# EAGLE board MxxxSMT8x11 (EAGLE 6.6.0), part 1 of 5
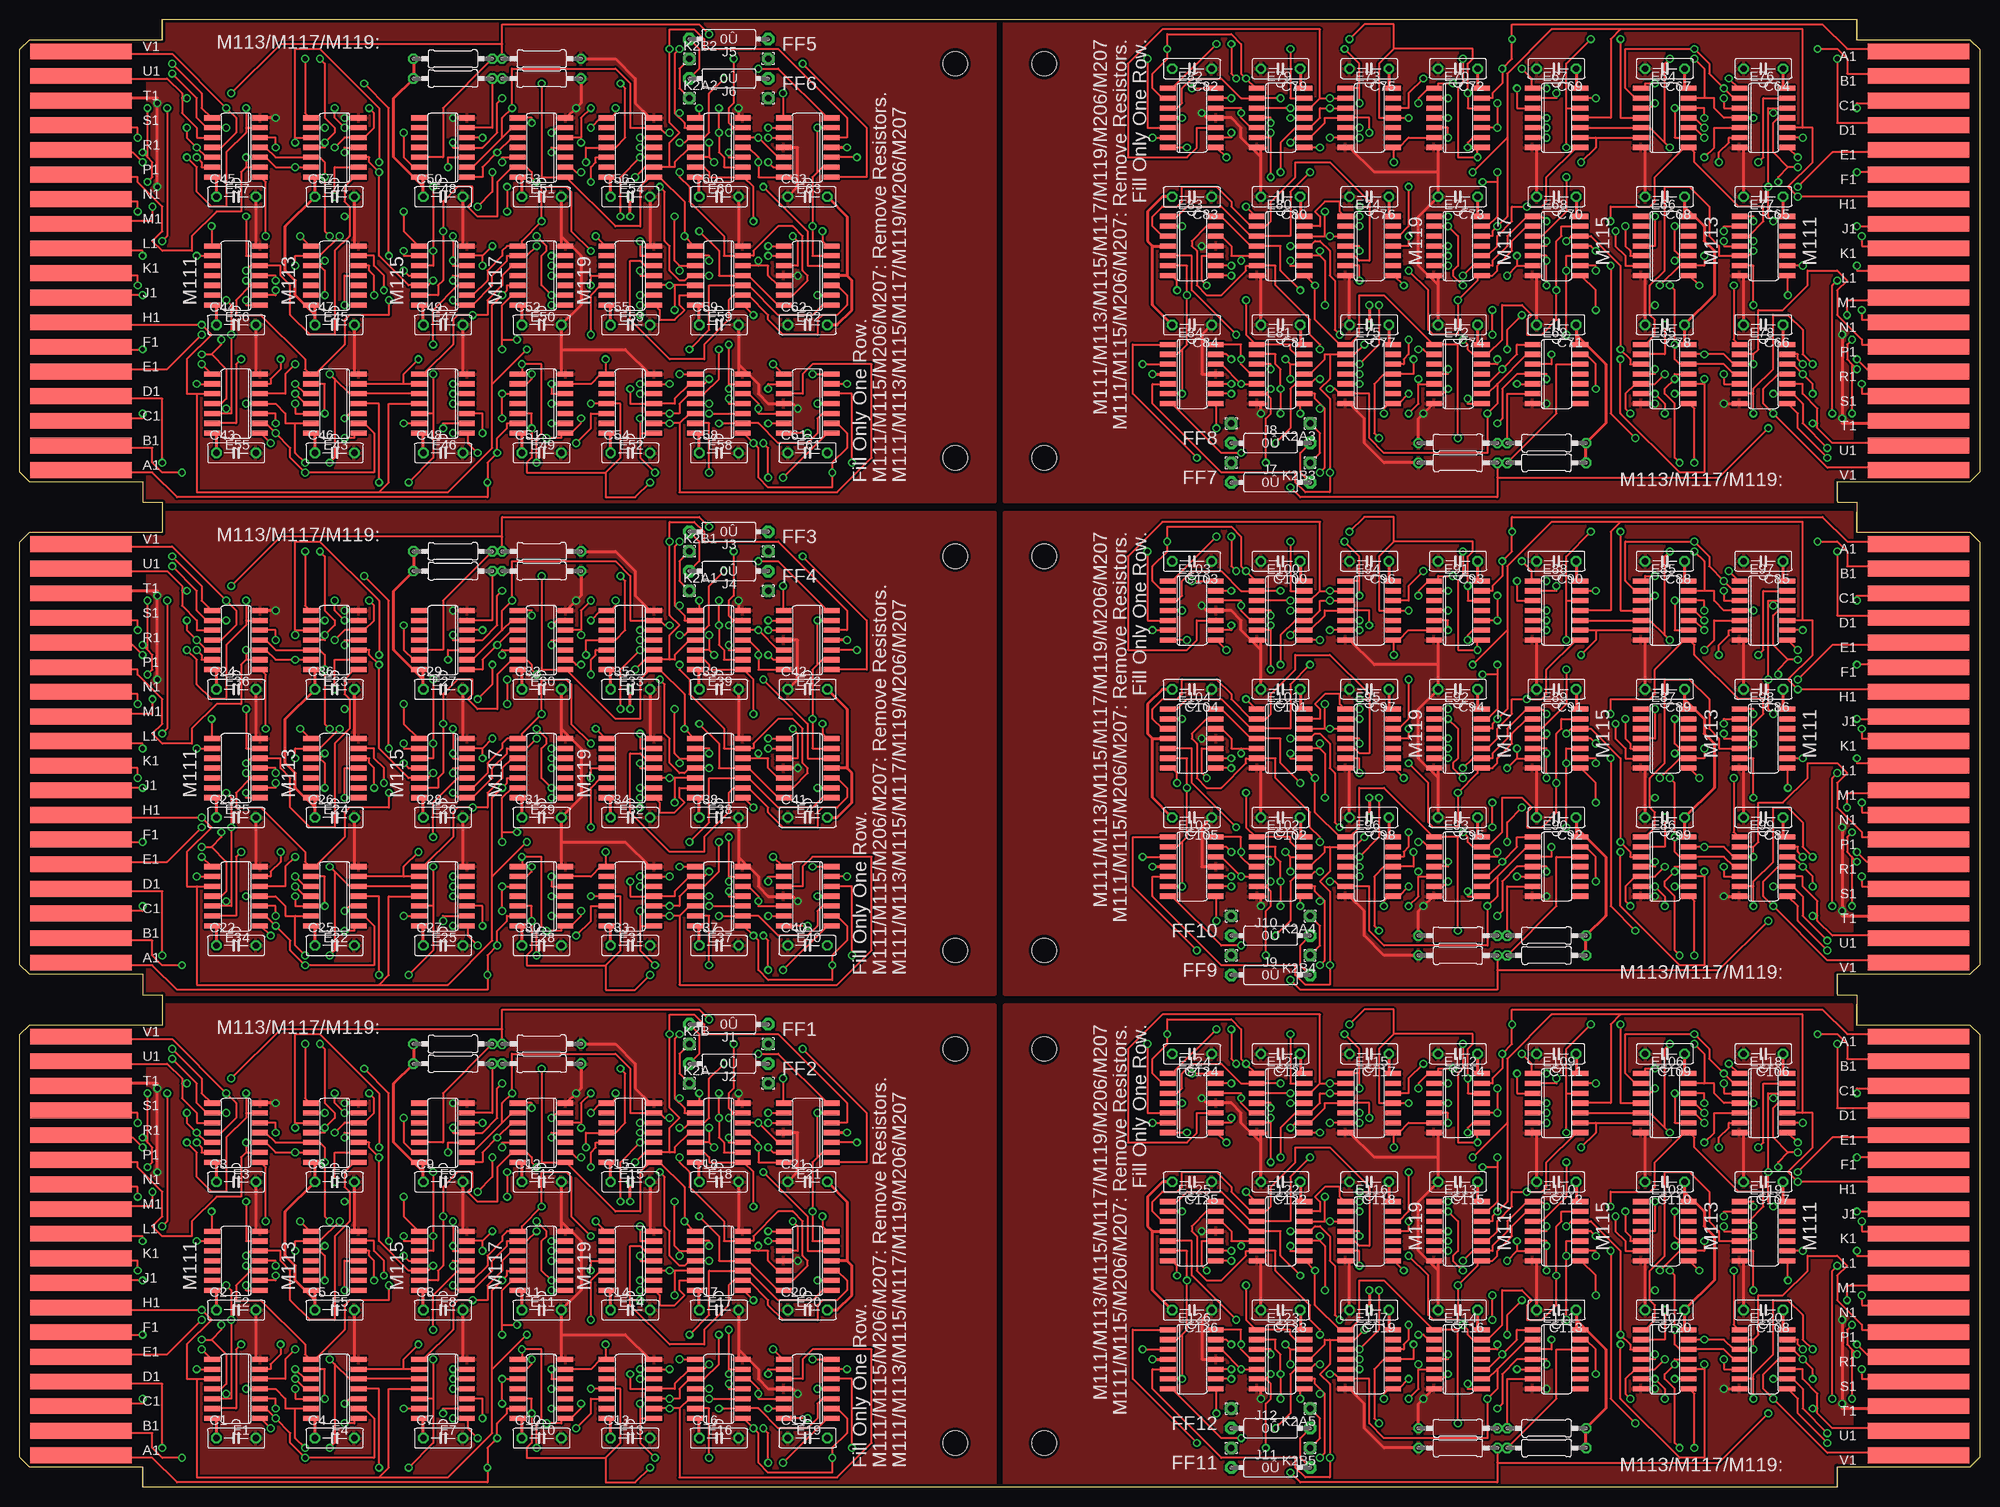
[diagram p0: board, top side]
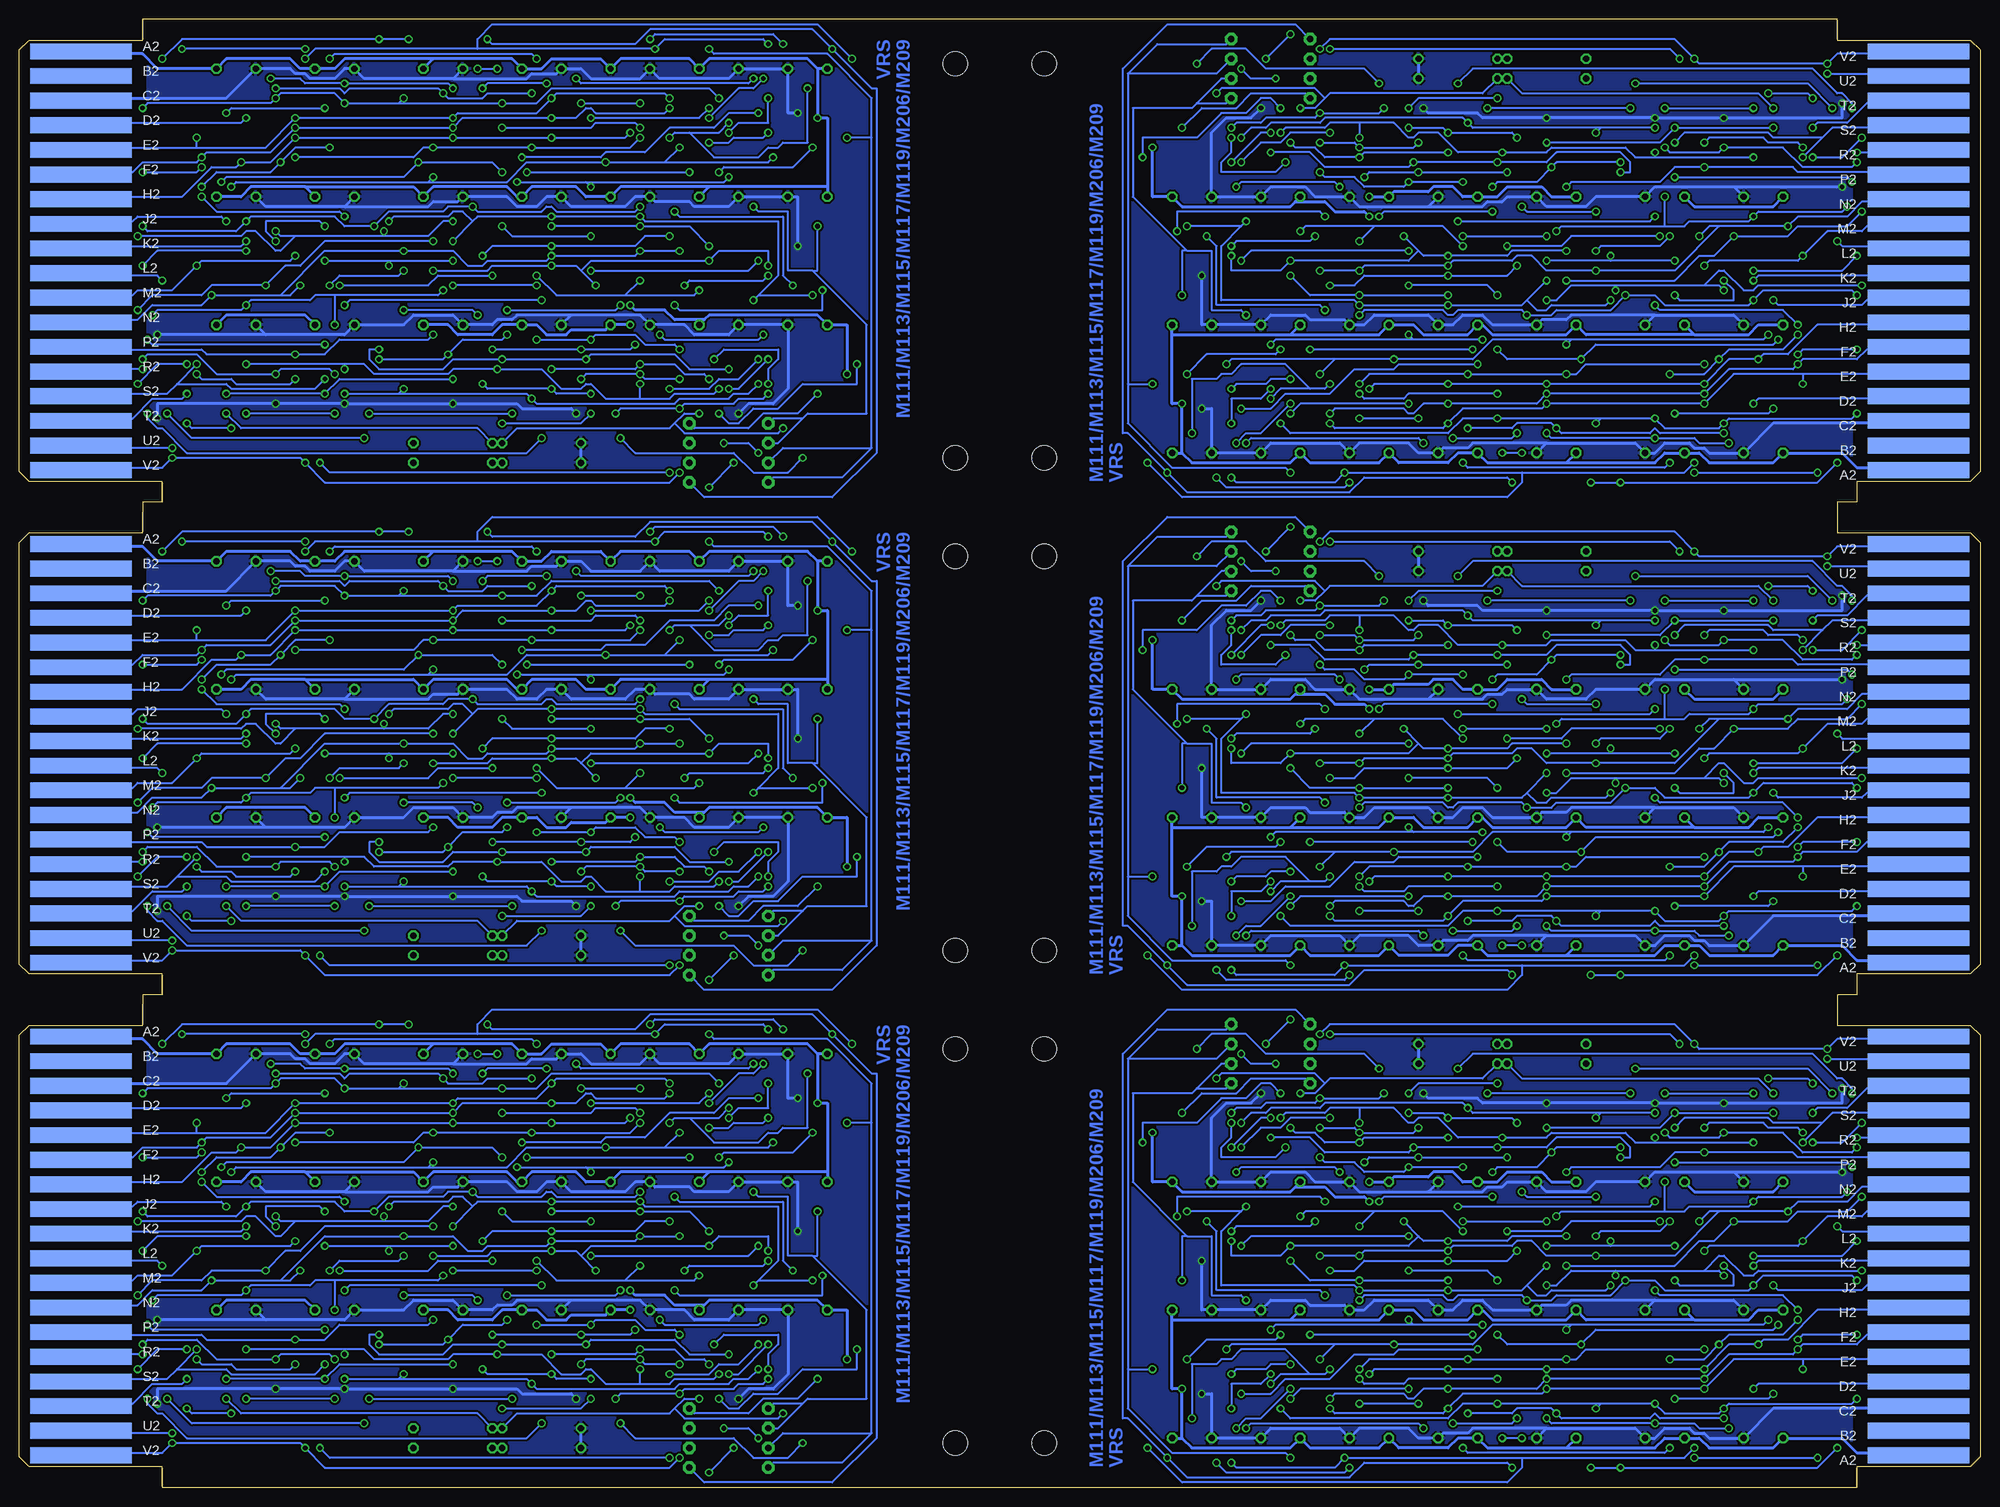
[diagram p1: board, bottom side, seen from below]

Size 252.73 x 189.23 mm. Coordinates in mm from the lower left corner, seen from the top.
Outline: 18.41,186.69 18.41,189.23 236.85,189.23 236.85,186.69
Outline: 234.31,129.54 234.31,127 236.85,127 236.85,123.19
Outline: 234.31,66.04 234.31,63.5 236.85,63.5 236.85,59.69
Outline: 234.31,2.54 234.31,0 15.88,0 15.88,2.54
Outline: 15.88,129.54 15.88,127 18.41,127 18.41,123.19
Outline: 15.88,66.04 15.88,63.5 18.41,63.5 18.41,59.69
Copper layers (1*16): Top 0.035mm / dielectric 1.5mm / Bottom 0.035mm
Design rules "10mils": minimum track width 10mil, minimum drill 24mil, track to track 10mil, track to pad 10mil, pad to pad 10mil, via to via 10mil, smd to smd 0mil, copper to edge 15mil, drill to drill 10mil, minimum pad ring 10mil, minimum via ring 8mil, stop-mask expansion 0mil, vias tented up to drill 0mil, thermal gap 10mil
Net classes: 1 Power: width 0.381 mm
Holes 3.17 mm at 120.65,183.51 132.08,183.51 120.65,132.72 132.08,132.72 132.08,120.02 120.65,120.02 120.65,69.22 120.65,56.52 132.08,56.52 132.08,69.22 120.65,5.71 132.08,5.71

## Footprints (pad centres in the part's own frame; a part is rotated, then mirrored left to right if it is on the bottom)
C050-025X075 = drill 0.813 octagon: 1 -2.54,0; 2 2.54,0
SO14 = smd 0.66 x 2.032: 1 -3.81,-3.073; 2 -2.54,-3.073; 3 -1.27,-3.073; 4 0,-3.073; 5 1.27,-3.073; 6 2.54,-3.073; 7 3.81,-3.073; 8 3.81,3.073; 9 2.54,3.073; 10 1.27,3.073; 11 0,3.073; 12 -1.27,3.073; 13 -2.54,3.073; 14 -3.81,3.073
1,6/0,8 = drill 0.813 pad 1.6 octagon: 1 0,0
0R/10 = drill 0.813 pad 1.6 octagon: 1 -5.08,0; 2 5.08,0
0207/10 = drill 0.813 octagon: 1 -5.08,0; 2 5.08,0
EDGE-CON2 = smd 13.106 x 2.032: A1 7.938,4.128; B1 7.938,7.303; C1 7.938,10.477; D1 7.938,13.652; E1 7.938,16.828; F1 7.938,20.003; H1 7.938,23.177; J1 7.938,26.352; K1 7.938,29.527; L1 7.938,32.703; M1 7.938,35.877; N1 7.938,39.053; P1 7.938,42.227; R1 7.938,45.403; S1 7.938,48.578; T1 7.938,51.752; U1 7.938,54.928; V1 7.938,58.102 | smd 13.106 x 2.032 bottom: A2 7.938,4.128; B2 7.938,7.303; C2 7.938,10.477; D2 7.938,13.652; E2 7.938,16.828; F2 7.938,20.003; H2 7.938,23.177; J2 7.938,26.352; K2 7.938,29.527; L2 7.938,32.703; M2 7.938,35.877; N2 7.938,39.053; P2 7.938,42.227; R2 7.938,45.403; S2 7.938,48.578; T2 7.938,51.752; U2 7.938,54.928; V2 7.938,58.102

## Placement (x,y rotation side)
C1  0.1uf  [C050-025X075]  27.94,6.35 0 top
C2  0.1uf  [C050-025X075]  27.94,22.86 0 top
C3  0.1uf  [C050-025X075]  27.94,39.37 0 top
C4  0.1uf  [C050-025X075]  40.64,6.35 0 top
C5  0.1uf  [C050-025X075]  40.64,22.86 0 top
C6  0.1uf  [C050-025X075]  40.64,39.37 0 top
C7  0.1uf  [C050-025X075]  54.61,6.35 0 top
C8  0.1uf  [C050-025X075]  54.61,22.86 0 top
C9  0.1uf  [C050-025X075]  54.61,39.37 0 top
C10  0.1uf  [C050-025X075]  67.31,6.35 0 top
C11  0.1uf  [C050-025X075]  67.31,22.86 0 top
C12  0.1uf  [C050-025X075]  67.31,39.37 0 top
C13  0.1uf  [C050-025X075]  78.74,6.35 0 top
C14  0.1uf  [C050-025X075]  78.74,22.86 0 top
C15  0.1uf  [C050-025X075]  78.74,39.37 0 top
C16  0.1uf  [C050-025X075]  90.17,6.35 0 top
C17  0.1uf  [C050-025X075]  90.17,22.86 0 top
C18  0.1uf  [C050-025X075]  90.17,39.37 0 top
C19  0.1uf  [C050-025X075]  101.6,6.35 180 top
C20  0.1uf  [C050-025X075]  101.6,22.86 180 top
C21  0.1uf  [C050-025X075]  101.6,39.37 180 top
C22  0.1uf  [C050-025X075]  27.94,69.85 0 top
C23  0.1uf  [C050-025X075]  27.94,86.36 0 top
C24  0.1uf  [C050-025X075]  27.94,102.87 0 top
C25  0.1uf  [C050-025X075]  40.64,69.85 0 top
C26  0.1uf  [C050-025X075]  40.64,86.36 0 top
C27  0.1uf  [C050-025X075]  54.61,69.85 0 top
C28  0.1uf  [C050-025X075]  54.61,86.36 0 top
C29  0.1uf  [C050-025X075]  54.61,102.87 0 top
C30  0.1uf  [C050-025X075]  67.31,69.85 0 top
C31  0.1uf  [C050-025X075]  67.31,86.36 0 top
C32  0.1uf  [C050-025X075]  67.31,102.87 0 top
C33  0.1uf  [C050-025X075]  78.74,69.85 0 top
C34  0.1uf  [C050-025X075]  78.74,86.36 0 top
C35  0.1uf  [C050-025X075]  78.74,102.87 0 top
C36  0.1uf  [C050-025X075]  40.64,102.87 0 top
C37  0.1uf  [C050-025X075]  90.17,69.85 0 top
C38  0.1uf  [C050-025X075]  90.17,86.36 0 top
C39  0.1uf  [C050-025X075]  90.17,102.87 0 top
C40  0.1uf  [C050-025X075]  101.6,69.85 180 top
C41  0.1uf  [C050-025X075]  101.6,86.36 180 top
C42  0.1uf  [C050-025X075]  101.6,102.87 180 top
C43  0.1uf  [C050-025X075]  27.94,133.35 0 top
C44  0.1uf  [C050-025X075]  27.94,149.86 0 top
C45  0.1uf  [C050-025X075]  27.94,166.37 0 top
C46  0.1uf  [C050-025X075]  40.64,133.35 0 top
C47  0.1uf  [C050-025X075]  40.64,149.86 0 top
C48  0.1uf  [C050-025X075]  54.61,133.35 0 top
C49  0.1uf  [C050-025X075]  54.61,149.86 0 top
C50  0.1uf  [C050-025X075]  54.61,166.37 0 top
C51  0.1uf  [C050-025X075]  67.31,133.35 0 top
C52  0.1uf  [C050-025X075]  67.31,149.86 0 top
C53  0.1uf  [C050-025X075]  67.31,166.37 0 top
C54  0.1uf  [C050-025X075]  78.74,133.35 0 top
C55  0.1uf  [C050-025X075]  78.74,149.86 0 top
C56  0.1uf  [C050-025X075]  78.74,166.37 0 top
C57  0.1uf  [C050-025X075]  40.64,166.37 0 top
C58  0.1uf  [C050-025X075]  90.17,133.35 0 top
C59  0.1uf  [C050-025X075]  90.17,149.86 0 top
C60  0.1uf  [C050-025X075]  90.17,166.37 0 top
C61  0.1uf  [C050-025X075]  101.6,133.35 180 top
C62  0.1uf  [C050-025X075]  101.6,149.86 180 top
C63  0.1uf  [C050-025X075]  101.6,166.37 180 top
C64  0.1uf  [C050-025X075]  224.79,182.88 180 top
C65  0.1uf  [C050-025X075]  224.79,166.37 180 top
C66  0.1uf  [C050-025X075]  224.79,149.86 180 top
C67  0.1uf  [C050-025X075]  212.09,182.88 180 top
C68  0.1uf  [C050-025X075]  212.09,166.37 180 top
C69  0.1uf  [C050-025X075]  198.12,182.88 180 top
C70  0.1uf  [C050-025X075]  198.12,166.37 180 top
C71  0.1uf  [C050-025X075]  198.12,149.86 180 top
C72  0.1uf  [C050-025X075]  185.42,182.88 180 top
C73  0.1uf  [C050-025X075]  185.42,166.37 180 top
C74  0.1uf  [C050-025X075]  185.42,149.86 180 top
C75  0.1uf  [C050-025X075]  173.99,182.88 180 top
C76  0.1uf  [C050-025X075]  173.99,166.37 180 top
C77  0.1uf  [C050-025X075]  173.99,149.86 180 top
C78  0.1uf  [C050-025X075]  212.09,149.86 180 top
C79  0.1uf  [C050-025X075]  162.56,182.88 180 top
C80  0.1uf  [C050-025X075]  162.56,166.37 180 top
C81  0.1uf  [C050-025X075]  162.56,149.86 180 top
C82  0.1uf  [C050-025X075]  151.13,182.88 0 top
C83  0.1uf  [C050-025X075]  151.13,166.37 0 top
C84  0.1uf  [C050-025X075]  151.13,149.86 0 top
C85  0.1uf  [C050-025X075]  224.79,119.38 180 top
C86  0.1uf  [C050-025X075]  224.79,102.87 180 top
C87  0.1uf  [C050-025X075]  224.79,86.36 180 top
C88  0.1uf  [C050-025X075]  212.09,119.38 180 top
C89  0.1uf  [C050-025X075]  212.09,102.87 180 top
C90  0.1uf  [C050-025X075]  198.12,119.38 180 top
C91  0.1uf  [C050-025X075]  198.12,102.87 180 top
C92  0.1uf  [C050-025X075]  198.12,86.36 180 top
C93  0.1uf  [C050-025X075]  185.42,119.38 180 top
C94  0.1uf  [C050-025X075]  185.42,102.87 180 top
C95  0.1uf  [C050-025X075]  185.42,86.36 180 top
C96  0.1uf  [C050-025X075]  173.99,119.38 180 top
C97  0.1uf  [C050-025X075]  173.99,102.87 180 top
C98  0.1uf  [C050-025X075]  173.99,86.36 180 top
C99  0.1uf  [C050-025X075]  212.09,86.36 180 top
C100  0.1uf  [C050-025X075]  162.56,119.38 180 top
C101  0.1uf  [C050-025X075]  162.56,102.87 180 top
C102  0.1uf  [C050-025X075]  162.56,86.36 180 top
C103  0.1uf  [C050-025X075]  151.13,119.38 0 top
C104  0.1uf  [C050-025X075]  151.13,102.87 0 top
C105  0.1uf  [C050-025X075]  151.13,86.36 0 top
C106  0.1uf  [C050-025X075]  224.79,55.88 180 top
C107  0.1uf  [C050-025X075]  224.79,39.37 180 top
C108  0.1uf  [C050-025X075]  224.79,22.86 180 top
C109  0.1uf  [C050-025X075]  212.09,55.88 180 top
C110  0.1uf  [C050-025X075]  212.09,39.37 180 top
C111  0.1uf  [C050-025X075]  198.12,55.88 180 top
C112  0.1uf  [C050-025X075]  198.12,39.37 180 top
C113  0.1uf  [C050-025X075]  198.12,22.86 180 top
C114  0.1uf  [C050-025X075]  185.42,55.88 180 top
C115  0.1uf  [C050-025X075]  185.42,39.37 180 top
C116  0.1uf  [C050-025X075]  185.42,22.86 180 top
C117  0.1uf  [C050-025X075]  173.99,55.88 180 top
C118  0.1uf  [C050-025X075]  173.99,39.37 180 top
C119  0.1uf  [C050-025X075]  173.99,22.86 180 top
C120  0.1uf  [C050-025X075]  212.09,22.86 180 top
C121  0.1uf  [C050-025X075]  162.56,55.88 180 top
C122  0.1uf  [C050-025X075]  162.56,39.37 180 top
C123  0.1uf  [C050-025X075]  162.56,22.86 180 top
C124  0.1uf  [C050-025X075]  151.13,55.88 0 top
C125  0.1uf  [C050-025X075]  151.13,39.37 0 top
C126  0.1uf  [C050-025X075]  151.13,22.86 0 top
E1  7404D  [SO14]  27.94,12.7 90 top
E2  7404D  [SO14]  27.94,29.21 90 top
E3  7404D  [SO14]  27.94,45.72 90 top
E4  7400D  [SO14]  40.64,12.7 90 top
E5  7400D  [SO14]  40.64,29.21 90 top
E6  7400D  [SO14]  40.64,45.72 90 top
E7  7410D  [SO14]  54.61,12.7 90 top
E8  7410D  [SO14]  54.61,29.21 90 top
E9  7410D  [SO14]  54.61,45.72 90 top
E10  7420D  [SO14]  67.31,12.7 90 top
E11  7420D  [SO14]  67.31,29.21 90 top
E12  7420D  [SO14]  67.31,45.72 90 top
E13  7430D  [SO14]  78.74,12.7 90 top
E14  7430D  [SO14]  78.74,29.21 90 top
E15  7430D  [SO14]  78.74,45.72 90 top
E16  7474D  [SO14]  90.17,12.7 90 top
E17  7474D  [SO14]  90.17,29.21 90 top
E18  7474D  [SO14]  90.17,45.72 90 top
E19  7473D  [SO14]  101.6,12.7 90 top
E20  7473D  [SO14]  101.6,29.21 90 top
E21  7473D  [SO14]  101.6,45.72 90 top
E22  7400D  [SO14]  40.64,76.2 90 top
E23  7400D  [SO14]  40.64,109.22 90 top
E24  7400D  [SO14]  40.64,92.71 90 top
E25  7410D  [SO14]  54.61,76.2 90 top
E26  7410D  [SO14]  54.61,92.71 90 top
E27  7410D  [SO14]  54.61,109.22 90 top
E28  7420D  [SO14]  67.31,76.2 90 top
E29  7420D  [SO14]  67.31,92.71 90 top
E30  7420D  [SO14]  67.31,109.22 90 top
E31  7430D  [SO14]  78.74,76.2 90 top
E32  7430D  [SO14]  78.74,92.71 90 top
E33  7430D  [SO14]  78.74,109.22 90 top
E34  7404D  [SO14]  27.94,76.2 90 top
E35  7404D  [SO14]  27.94,92.71 90 top
E36  7404D  [SO14]  27.94,109.22 90 top
E37  7474D  [SO14]  90.17,76.2 90 top
E38  7474D  [SO14]  90.17,92.71 90 top
E39  7474D  [SO14]  90.17,109.22 90 top
E40  7473D  [SO14]  101.6,76.2 90 top
E41  7473D  [SO14]  101.6,92.71 90 top
E42  7473D  [SO14]  101.6,109.22 90 top
E43  7400D  [SO14]  40.64,139.7 90 top
E44  7400D  [SO14]  40.64,172.72 90 top
E45  7400D  [SO14]  40.64,156.21 90 top
E46  7410D  [SO14]  54.61,139.7 90 top
E47  7410D  [SO14]  54.61,156.21 90 top
E48  7410D  [SO14]  54.61,172.72 90 top
E49  7420D  [SO14]  67.31,139.7 90 top
E50  7420D  [SO14]  67.31,156.21 90 top
E51  7420D  [SO14]  67.31,172.72 90 top
E52  7430D  [SO14]  78.74,139.7 90 top
E53  7430D  [SO14]  78.74,156.21 90 top
E54  7430D  [SO14]  78.74,172.72 90 top
E55  7404D  [SO14]  27.94,139.7 90 top
E56  7404D  [SO14]  27.94,156.21 90 top
E57  7404D  [SO14]  27.94,172.72 90 top
E58  7474D  [SO14]  90.17,139.7 90 top
E59  7474D  [SO14]  90.17,156.21 90 top
E60  7474D  [SO14]  90.17,172.72 90 top
E61  7473D  [SO14]  101.6,139.7 90 top
E62  7473D  [SO14]  101.6,156.21 90 top
E63  7473D  [SO14]  101.6,172.72 90 top
E64  7400D  [SO14]  212.09,176.53 270 top
E65  7400D  [SO14]  212.09,143.51 270 top
E66  7400D  [SO14]  212.09,160.02 270 top
E67  7410D  [SO14]  198.12,176.53 270 top
E68  7410D  [SO14]  198.12,160.02 270 top
E69  7410D  [SO14]  198.12,143.51 270 top
E70  7420D  [SO14]  185.42,176.53 270 top
E71  7420D  [SO14]  185.42,160.02 270 top
E72  7420D  [SO14]  185.42,143.51 270 top
E73  7430D  [SO14]  173.99,176.53 270 top
E74  7430D  [SO14]  173.99,160.02 270 top
E75  7430D  [SO14]  173.99,143.51 270 top
E76  7404D  [SO14]  224.79,176.53 270 top
E77  7404D  [SO14]  224.79,160.02 270 top
E78  7404D  [SO14]  224.79,143.51 270 top
E79  7474D  [SO14]  162.56,176.53 270 top
E80  7474D  [SO14]  162.56,160.02 270 top
E81  7474D  [SO14]  162.56,143.51 270 top
E82  7473D  [SO14]  151.13,176.53 270 top
E83  7473D  [SO14]  151.13,160.02 270 top
E84  7473D  [SO14]  151.13,143.51 270 top
E85  7400D  [SO14]  212.09,113.03 270 top
E86  7400D  [SO14]  212.09,80.01 270 top
E87  7400D  [SO14]  212.09,96.52 270 top
E88  7410D  [SO14]  198.12,113.03 270 top
E89  7410D  [SO14]  198.12,96.52 270 top
E90  7410D  [SO14]  198.12,80.01 270 top
E91  7420D  [SO14]  185.42,113.03 270 top
E92  7420D  [SO14]  185.42,96.52 270 top
E93  7420D  [SO14]  185.42,80.01 270 top
E94  7430D  [SO14]  173.99,113.03 270 top
E95  7430D  [SO14]  173.99,96.52 270 top
E96  7430D  [SO14]  173.99,80.01 270 top
E97  7404D  [SO14]  224.79,113.03 270 top
E98  7404D  [SO14]  224.79,96.52 270 top
E99  7404D  [SO14]  224.79,80.01 270 top
E100  7474D  [SO14]  162.56,113.03 270 top
E101  7474D  [SO14]  162.56,96.52 270 top
E102  7474D  [SO14]  162.56,80.01 270 top
E103  7473D  [SO14]  151.13,113.03 270 top
E104  7473D  [SO14]  151.13,96.52 270 top
E105  7473D  [SO14]  151.13,80.01 270 top
E106  7400D  [SO14]  212.09,49.53 270 top
E107  7400D  [SO14]  212.09,16.51 270 top
E108  7400D  [SO14]  212.09,33.02 270 top
E109  7410D  [SO14]  198.12,49.53 270 top
E110  7410D  [SO14]  198.12,33.02 270 top
E111  7410D  [SO14]  198.12,16.51 270 top
E112  7420D  [SO14]  185.42,49.53 270 top
E113  7420D  [SO14]  185.42,33.02 270 top
E114  7420D  [SO14]  185.42,16.51 270 top
E115  7430D  [SO14]  173.99,49.53 270 top
E116  7430D  [SO14]  173.99,33.02 270 top
E117  7430D  [SO14]  173.99,16.51 270 top
E118  7404D  [SO14]  224.79,49.53 270 top
E119  7404D  [SO14]  224.79,33.02 270 top
E120  7404D  [SO14]  224.79,16.51 270 top
E121  7474D  [SO14]  162.56,49.53 270 top
E122  7474D  [SO14]  162.56,33.02 270 top
E123  7474D  [SO14]  162.56,16.51 270 top
E124  7473D  [SO14]  151.13,49.53 270 top
E125  7473D  [SO14]  151.13,33.02 270 top
E126  7473D  [SO14]  151.13,16.51 270 top
FF1  [1,6/0,8]  96.52,57.15 0 top
FF2  [1,6/0,8]  96.52,52.07 0 top
FF3  [1,6/0,8]  96.52,120.65 0 top
FF4  [1,6/0,8]  96.52,115.57 0 top
FF5  [1,6/0,8]  96.52,184.15 0 top
FF6  [1,6/0,8]  96.52,179.07 0 top
FF7  [1,6/0,8]  156.21,132.08 180 top
FF8  [1,6/0,8]  156.21,137.16 180 top
FF9  [1,6/0,8]  156.21,68.58 180 top
FF10  [1,6/0,8]  156.21,73.66 180 top
FF11  [1,6/0,8]  156.21,5.08 180 top
FF12  [1,6/0,8]  156.21,10.16 180 top
J1  [0R/10]  91.44,59.69 0 top
J2  [0R/10]  91.44,54.61 0 top
J3  [0R/10]  91.44,123.19 0 top
J4  [0R/10]  91.44,118.11 0 top
J5  [0R/10]  91.44,186.69 0 top
J6  [0R/10]  91.44,181.61 0 top
J7  [0R/10]  161.29,129.54 180 top
J8  [0R/10]  161.29,134.62 180 top
J9  [0R/10]  161.29,66.04 180 top
J10  [0R/10]  161.29,71.12 180 top
J11  [0R/10]  161.29,2.54 180 top
J12  [0R/10]  161.29,7.62 180 top
K2A  [1,6/0,8]  86.36,52.07 0 top
K2A1  [1,6/0,8]  86.36,115.57 0 top
K2A2  [1,6/0,8]  86.36,179.07 0 top
K2A3  [1,6/0,8]  166.37,137.16 180 top
K2A4  [1,6/0,8]  166.37,73.66 180 top
K2A5  [1,6/0,8]  166.37,10.16 180 top
K2B  [1,6/0,8]  86.36,57.15 0 top
K2B1  [1,6/0,8]  86.36,120.65 0 top
K2B2  [1,6/0,8]  86.36,184.15 0 top
K2B3  [1,6/0,8]  166.37,132.08 180 top
K2B4  [1,6/0,8]  166.37,68.58 180 top
K2B5  [1,6/0,8]  166.37,5.08 180 top
R1  750  [0207/10]  67.31,57.15 180 top
R2  330  [0207/10]  55.88,57.15 180 top
R3  750  [0207/10]  67.31,54.61 180 top
R4  330  [0207/10]  55.88,54.61 180 top
R5  750  [0207/10]  67.31,120.65 180 top
R6  330  [0207/10]  55.88,120.65 180 top
R7  330  [0207/10]  55.88,118.11 180 top
R8  750  [0207/10]  67.31,118.11 180 top
R9  750  [0207/10]  67.31,184.15 180 top
R10  330  [0207/10]  55.88,184.15 180 top
R11  330  [0207/10]  55.88,181.61 180 top
R12  750  [0207/10]  67.31,181.61 180 top
R13  750  [0207/10]  185.42,132.08 0 top
R14  330  [0207/10]  196.85,132.08 0 top
R15  330  [0207/10]  196.85,134.62 0 top
R16  750  [0207/10]  185.42,134.62 0 top
R17  750  [0207/10]  185.42,68.58 0 top
R18  330  [0207/10]  196.85,68.58 0 top
R19  330  [0207/10]  196.85,71.12 0 top
R20  750  [0207/10]  185.42,71.12 0 top
R21  750  [0207/10]  185.42,5.08 0 top
R22  330  [0207/10]  196.85,5.08 0 top
R23  330  [0207/10]  196.85,7.62 0 top
R24  750  [0207/10]  185.42,7.62 0 top
U$1  [EDGE-CON2]  0,0 0 top
U$2  [EDGE-CON2]  0,63.5 0 top
U$5  [EDGE-CON2]  0,127 0 top
U$7  [EDGE-CON2]  252.73,189.23 180 top
U$9  [EDGE-CON2]  252.73,125.73 180 top
U$11  [EDGE-CON2]  252.73,62.23 180 top

## Library data of the parts
C1-C126 R1-R24 = rcl
E1-E126 = 74xx-us
FF1-FF12 K2A K2A1-K2A5 K2B K2B1-K2B5 = wirepad
J1-J12 = jumper
U$1 U$2 U$5 U$7 U$9 U$11 = dec-con

## Nets
A1: E1.1 E4.1 E7.1 E10.13 E13.12 E16.1 E19.2 J1.1 J2.1 U$1.A1
A2: E22.1 E25.1 E28.13 E31.12 E34.1 E37.1 E40.2 J3.1 J4.1 U$2.A1
A3: E43.1 E46.1 E49.13 E52.12 E55.1 E58.1 E61.2 J5.1 J6.1 U$5.A1
A4: E64.1 E67.1 E70.13 E73.12 E76.1 E79.1 E82.2 J7.1 J8.1 U$7.A1
A5: E85.1 E88.1 E91.13 E94.12 E97.1 E100.1 E103.2 J9.1 J10.1 U$9.A1
A6: E106.1 E109.1 E112.13 E115.12 E118.1 E121.1 E124.2 J11.1 J12.1 U$11.A1
B1: E1.2 E4.2 E7.2 E10.12 E13.11 E16.3 E19.1 U$1.B1
B2: U$1.B2
B3: U$2.B2
B4: E22.2 E25.2 E28.12 E31.11 E34.2 E37.3 E40.1 U$2.B1
B5: U$5.B2
B6: E43.2 E46.2 E49.12 E52.11 E55.2 E58.3 E61.1 U$5.B1
B7: U$7.B2
B8: E64.2 E67.2 E70.12 E73.11 E76.2 E79.3 E82.1 U$7.B1
B9: U$9.B2
B10: E85.2 E88.2 E91.12 E94.11 E97.2 E100.3 E103.1 U$9.B1
B11: U$11.B2
B12: E106.2 E109.2 E112.12 E115.11 E118.2 E121.3 E124.1 U$11.B1
C1: E1.3 E4.3 E7.13 E10.10 E13.5 E16.2 E19.3 U$1.C1
C2: E22.3 E25.13 E28.10 E31.5 E34.3 E37.2 E40.3 U$2.C1
C3: E43.3 E46.13 E49.10 E52.5 E55.3 E58.2 E61.3 U$5.C1
C4: E64.3 E67.13 E70.10 E73.5 E76.3 E79.2 E82.3 U$7.C1
C5: E85.3 E88.13 E91.10 E94.5 E97.3 E100.2 E103.3 U$9.C1
C6: E106.3 E109.13 E112.10 E115.5 E118.3 E121.2 E124.3 U$11.C1
D1: E1.5 E4.4 E7.12 E10.9 E13.6 E16.4 E19.14 U$1.D1
D2: E1.4 E4.13 E7.3 E10.1 E13.1 E16.11 E19.5 U$1.D2
D3: E22.13 E25.3 E28.1 E31.1 E34.4 E37.11 E40.5 U$2.D2
D4: E22.4 E25.12 E28.9 E31.6 E34.5 E37.4 E40.14 U$2.D1
D5: E43.13 E46.3 E49.1 E52.1 E55.4 E58.11 E61.5 U$5.D2
D6: E43.4 E46.12 E49.9 E52.6 E55.5 E58.4 E61.14 U$5.D1
D7: E64.13 E67.3 E70.1 E73.1 E76.4 E79.11 E82.5 U$7.D2
D8: E64.4 E67.12 E70.9 E73.6 E76.5 E79.4 E82.14 U$7.D1
D9: E85.13 E88.3 E91.1 E94.1 E97.4 E100.11 E103.5 U$9.D2
D10: E85.4 E88.12 E91.9 E94.6 E97.5 E100.4 E103.14 U$9.D1
D11: E106.13 E109.3 E112.1 E115.1 E118.4 E121.11 E124.5 U$11.D2
D12: E106.4 E109.12 E112.9 E115.6 E118.5 E121.4 E124.14 U$11.D1
E1: E1.6 E4.5 E7.10 E10.8 E16.5 E19.12 U$1.E1
E2: E1.9 E4.12 E7.4 E10.2 E13.2 E16.12 E19.10 U$1.E2
E3: E22.12 E25.4 E28.2 E31.2 E34.9 E37.12 E40.10 U$2.E2
E4: E22.5 E25.10 E28.8 E34.6 E37.5 E40.12 U$2.E1
E5: E43.12 E46.4 E49.2 E52.2 E55.9 E58.12 E61.10 U$5.E2
E6: E43.5 E46.10 E49.8 E55.6 E58.5 E61.12 U$5.E1
E7: E64.12 E67.4 E70.2 E73.2 E76.9 E79.12 E82.10 U$7.E2
E8: E64.5 E67.10 E70.8 E76.6 E79.5 E82.12 U$7.E1
E9: E85.12 E88.4 E91.2 E94.2 E97.9 E100.12 E103.10 U$9.E2
E10: E85.5 E88.10 E91.8 E97.6 E100.5 E103.12 U$9.E1
E11: E106.12 E109.4 E112.2 E115.2 E118.9 E121.12 E124.10 U$11.E2
E12: E106.5 E109.10 E112.8 E118.6 E121.5 E124.12 U$11.E1
F1: E1.11 E4.6 E7.9 E11.13 E14.12 E16.6 E19.13 U$1.F1
F2: E1.8 E4.11 E7.5 E10.4 E13.3 E16.10 E19.7 U$1.F2
F3: E22.11 E25.5 E28.4 E31.3 E34.8 E37.10 E40.7 U$2.F2
F4: E22.6 E25.9 E29.13 E32.12 E34.11 E37.6 E40.13 U$2.F1
F5: E43.11 E46.5 E49.4 E52.3 E55.8 E58.10 E61.7 U$5.F2
F6: E43.6 E46.9 E50.13 E53.12 E55.11 E58.6 E61.13 U$5.F1
F7: E64.11 E67.5 E70.4 E73.3 E76.8 E79.10 E82.7 U$7.F2
F8: E64.6 E67.9 E71.13 E74.12 E76.11 E79.6 E82.13 U$7.F1
F9: E85.11 E88.5 E91.4 E94.3 E97.8 E100.10 E103.7 U$9.F2
F10: E85.6 E88.9 E92.13 E95.12 E97.11 E100.6 E103.13 U$9.F1
F11: E106.11 E109.5 E112.4 E115.3 E118.8 E121.10 E124.7 U$11.F2
F12: E106.6 E109.9 E113.13 E116.12 E118.11 E121.6 E124.13 U$11.F1
FF1: E16.13 E19.6 FF1.1 J1.2
FF2: E17.1 E20.2 FF2.1 J2.2
FF3: E37.13 E40.6 FF3.1 J3.2
FF4: E38.1 E41.2 FF4.1 J4.2
FF5: E58.13 E61.6 FF5.1 J5.2
FF6: E59.1 E62.2 FF6.1 J6.2
FF7: E79.13 E82.6 FF7.1 J7.2
FF8: E80.1 E83.2 FF8.1 J8.2
FF9: E100.13 E103.6 FF9.1 J9.2
FF10: E101.1 E104.2 FF10.1 J10.2
FF11: E121.13 E124.6 FF11.1 J11.2
FF12: E122.1 E125.2 FF12.1 J12.2
GND [Power]: C1.2 C2.2 C3.2 C4.2 C5.2 C6.2 C7.2 C8.2 C9.2 C10.2 C11.2 C12.2 C13.2 C14.2 C15.2 C16.2 C17.2 C18.2 C19.2 C20.2 C21.2 E1.7 E2.7 E3.7 E4.7 E5.7 E6.7 E7.7 E8.7 E9.7 E10.7 E11.7 E12.7 E13.7 E14.7 E15.7 E16.7 E17.7 E18.7 E19.11 E20.11 E21.11 R1.1 R3.1 U$1.C2 U$1.T1
GND1 [Power]: C22.2 C23.2 C24.2 C25.2 C26.2 C27.2 C28.2 C29.2 C30.2 C31.2 C32.2 C33.2 C34.2 C35.2 C36.2 C37.2 C38.2 C39.2 C40.2 C41.2 C42.2 E22.7 E23.7 E24.7 E25.7 E26.7 E27.7 E28.7 E29.7 E30.7 E31.7 E32.7 E33.7 E34.7 E35.7 E36.7 E37.7 E38.7 E39.7 E40.11 E41.11 E42.11 R5.1 R8.1 U$2.C2 U$2.T1
GND2 [Power]: C43.2 C44.2 C45.2 C46.2 C47.2 C48.2 C49.2 C50.2 C51.2 C52.2 C53.2 C54.2 C55.2 C56.2 C57.2 C58.2 C59.2 C60.2 C61.2 C62.2 C63.2 E43.7 E44.7 E45.7 E46.7 E47.7 E48.7 E49.7 E50.7 E51.7 E52.7 E53.7 E54.7 E55.7 E56.7 E57.7 E58.7 E59.7 E60.7 E61.11 E62.11 E63.11 R9.1 R12.1 U$5.C2 U$5.T1
GND3 [Power]: C64.2 C65.2 C66.2 C67.2 C68.2 C69.2 C70.2 C71.2 C72.2 C73.2 C74.2 C75.2 C76.2 C77.2 C78.2 C79.2 C80.2 C81.2 C82.2 C83.2 C84.2 E64.7 E65.7 E66.7 E67.7 E68.7 E69.7 E70.7 E71.7 E72.7 E73.7 E74.7 E75.7 E76.7 E77.7 E78.7 E79.7 E80.7 E81.7 E82.11 E83.11 E84.11 R13.1 R16.1 U$7.C2 U$7.T1
GND4 [Power]: C85.2 C86.2 C87.2 C88.2 C89.2 C90.2 C91.2 C92.2 C93.2 C94.2 C95.2 C96.2 C97.2 C98.2 C99.2 C100.2 C101.2 C102.2 C103.2 C104.2 C105.2 E85.7 E86.7 E87.7 E88.7 E89.7 E90.7 E91.7 E92.7 E93.7 E94.7 E95.7 E96.7 E97.7 E98.7 E99.7 E100.7 E101.7 E102.7 E103.11 E104.11 E105.11 R17.1 R20.1 U$9.C2 U$9.T1
GND5 [Power]: C106.2 C107.2 C108.2 C109.2 C110.2 C111.2 C112.2 C113.2 C114.2 C115.2 C116.2 C117.2 C118.2 C119.2 C120.2 C121.2 C122.2 C123.2 C124.2 C125.2 C126.2 E106.7 E107.7 E108.7 E109.7 E110.7 E111.7 E112.7 E113.7 E114.7 E115.7 E116.7 E117.7 E118.7 E119.7 E120.7 E121.7 E122.7 E123.7 E124.11 E125.11 E126.11 R21.1 R24.1 U$11.C2 U$11.T1
H1: E1.10 E5.4 E7.11 E11.12 E14.11 E17.3 E20.1 U$1.H1
H2: E1.13 E4.10 E7.6 E10.5 E13.4 E16.9 E19.9 U$1.H2
H3: E22.10 E25.6 E28.5 E31.4 E34.13 E37.9 E40.9 U$2.H2
H4: E24.4 E25.11 E29.12 E32.11 E34.10 E38.3 E41.1 U$2.H1
H5: E43.10 E46.6 E49.5 E52.4 E55.13 E58.9 E61.9 U$5.H2
H6: E45.4 E46.11 E50.12 E53.11 E55.10 E59.3 E62.1 U$5.H1
H7: E64.10 E67.6 E70.5 E73.4 E76.13 E79.9 E82.9 U$7.H2
H8: E66.4 E67.11 E71.12 E74.11 E76.10 E80.3 E83.1 U$7.H1
H9: E85.10 E88.6 E91.5 E94.4 E97.13 E100.9 E103.9 U$9.H2
H10: E87.4 E88.11 E92.12 E95.11 E97.10 E101.3 E104.1 U$9.H1
H11: E106.10 E109.6 E112.5 E115.4 E118.13 E121.9 E124.9 U$11.H2
H12: E108.4 E109.11 E113.12 E116.11 E118.10 E122.3 E125.1 U$11.H1
J1: E2.1 E5.5 E7.8 E11.10 E14.5 E17.2 E20.3 U$1.J1
J2: E1.12 E4.9 E8.3 E10.6 E13.8 E16.8 E19.8 U$1.J2
J3: E22.9 E26.3 E28.6 E31.8 E34.12 E37.8 E40.8 U$2.J2
J4: E24.5 E25.8 E29.10 E32.5 E35.1 E38.2 E41.3 U$2.J1
J5: E43.9 E47.3 E49.6 E52.8 E55.12 E58.8 E61.8 U$5.J2
J6: E45.5 E46.8 E50.10 E53.5 E56.1 E59.2 E62.3 U$5.J1
J7: E64.9 E68.3 E70.6 E73.8 E76.12 E79.8 E82.8 U$7.J2
J8: E66.5 E67.8 E71.10 E74.5 E77.1 E80.2 E83.3 U$7.J1
J9: E85.9 E89.3 E91.6 E94.8 E97.12 E100.8 E103.8 U$9.J2
J10: E87.5 E88.8 E92.10 E95.5 E98.1 E101.2 E104.3 U$9.J1
J11: E106.9 E110.3 E112.6 E115.8 E118.12 E121.8 E124.8 U$11.J2
J12: E108.5 E109.8 E113.10 E116.5 E119.1 E122.2 E125.3 U$11.J1
K1: E2.2 E5.6 E8.1 E11.9 E14.6 E17.4 E20.14 U$1.K1
K2: E2.3 E4.8 E8.4 E11.1 E14.1 E17.13 E18.1 E18.13 E20.6 E21.2 E21.6 K2A.1 K2B.1 U$1.K2
K3: E22.8 E26.4 E29.1 E32.1 E35.3 E38.13 E39.1 E39.13 E41.6 E42.2 E42.6 K2A1.1 K2B1.1 U$2.K2
K4: E24.6 E26.1 E29.9 E32.6 E35.2 E38.4 E41.14 U$2.K1
K5: E43.8 E47.4 E50.1 E53.1 E56.3 E59.13 E60.1 E60.13 E62.6 E63.2 E63.6 K2A2.1 K2B2.1 U$5.K2
K6: E45.6 E47.1 E50.9 E53.6 E56.2 E59.4 E62.14 U$5.K1
K7: E64.8 E68.4 E71.1 E74.1 E77.3 E80.13 E81.1 E81.13 E83.6 E84.2 E84.6 K2A3.1 K2B3.1 U$7.K2
K8: E66.6 E68.1 E71.9 E74.6 E77.2 E80.4 E83.14 U$7.K1
K9: E85.8 E89.4 E92.1 E95.1 E98.3 E101.13 E102.1 E102.13 E104.6 E105.2 E105.6 K2A4.1 K2B4.1 U$9.K2
K10: E87.6 E89.1 E92.9 E95.6 E98.2 E101.4 E104.14 U$9.K1
K11: E106.8 E110.4 E113.1 E116.1 E119.3 E122.13 E123.1 E123.13 E125.6 E126.2 E126.6 K2A5.1 K2B5.1 U$11.K2
K12: E108.6 E110.1 E113.9 E116.6 E119.2 E122.4 E125.14 U$11.K1
L1: E2.5 E6.1 E8.2 E11.8 E17.5 E20.12 U$1.L1
L2: E2.4 E5.10 E8.5 E11.2 E14.2 E17.11 E20.5 U$1.L2
L3: E24.10 E26.5 E29.2 E32.2 E35.4 E38.11 E41.5 U$2.L2
L4: E23.1 E26.2 E29.8 E35.5 E38.5 E41.12 U$2.L1
L5: E45.10 E47.5 E50.2 E53.2 E56.4 E59.11 E62.5 U$5.L2
L6: E44.1 E47.2 E50.8 E56.5 E59.5 E62.12 U$5.L1
L7: E66.10 E68.5 E71.2 E74.2 E77.4 E80.11 E83.5 U$7.L2
L8: E65.1 E68.2 E71.8 E77.5 E80.5 E83.12 U$7.L1
L9: E87.10 E89.5 E92.2 E95.2 E98.4 E101.11 E104.5 U$9.L2
L10: E86.1 E89.2 E92.8 E98.5 E101.5 E104.12 U$9.L1
L11: E108.10 E110.5 E113.2 E116.2 E119.4 E122.11 E125.5 U$11.L2
L12: E107.1 E110.2 E113.8 E119.5 E122.5 E125.12 U$11.L1
M1: E2.6 E6.2 E8.13 E12.13 E15.12 E17.6 E20.13 U$1.M1
M2: E2.9 E5.9 E8.6 E11.4 E14.3 E17.12 E20.10 U$1.M2
M3: E24.9 E26.6 E29.4 E32.3 E35.9 E38.12 E41.10 U$2.M2
M4: E23.2 E26.13 E30.13 E33.12 E35.6 E38.6 E41.13 U$2.M1
M5: E45.9 E47.6 E50.4 E53.3 E56.9 E59.12 E62.10 U$5.M2
M6: E44.2 E47.13 E51.13 E54.12 E56.6 E59.6 E62.13 U$5.M1
M7: E66.9 E68.6 E71.4 E74.3 E77.9 E80.12 E83.10 U$7.M2
M8: E65.2 E68.13 E72.13 E75.12 E77.6 E80.6 E83.13 U$7.M1
M9: E87.9 E89.6 E92.4 E95.3 E98.9 E101.12 E104.10 U$9.M2
M10: E86.2 E89.13 E93.13 E96.12 E98.6 E101.6 E104.13 U$9.M1
M11: E108.9 E110.6 E113.4 E116.3 E119.9 E122.12 E125.10 U$11.M2
M12: E107.2 E110.13 E114.13 E117.12 E119.6 E122.6 E125.13 U$11.M1
N1: E3.1 E6.3 E8.12 E12.12 E15.11 E18.3 E21.1 U$1.N1
N2: E2.8 E5.8 E8.11 E11.5 E14.4 E17.10 E20.7 U$1.N2
N3: E24.8 E26.11 E29.5 E32.4 E35.8 E38.10 E41.7 U$2.N2
N4: E23.3 E26.12 E30.12 E33.11 E36.1 E39.3 E42.1 U$2.N1
N5: E45.8 E47.11 E50.5 E53.4 E56.8 E59.10 E62.7 U$5.N2
N6: E44.3 E47.12 E51.12 E54.11 E57.1 E60.3 E63.1 U$5.N1
N7: E66.8 E68.11 E71.5 E74.4 E77.8 E80.10 E83.7 U$7.N2
N8: E65.3 E68.12 E72.12 E75.11 E78.1 E81.3 E84.1 U$7.N1
N9: E87.8 E89.11 E92.5 E95.4 E98.8 E101.10 E104.7 U$9.N2
N10: E86.3 E89.12 E93.12 E96.11 E99.1 E102.3 E105.1 U$9.N1
N11: E108.8 E110.11 E113.5 E116.4 E119.8 E122.10 E125.7 U$11.N2
N12: E107.3 E110.12 E114.12 E117.11 E120.1 E123.3 E126.1 U$11.N1
P1: E3.2 E6.4 E9.1 E12.10 E15.5 E18.2 E21.3 U$1.P1
P2: E3.3 E6.13 E8.10 E11.6 E14.8 E17.9 E20.9 U$1.P2
P3: E23.13 E26.10 E29.6 E32.8 E36.3 E38.9 E41.9 U$2.P2
P4: E23.4 E27.1 E30.10 E33.5 E36.2 E39.2 E42.3 U$2.P1
P5: E44.13 E47.10 E50.6 E53.8 E57.3 E59.9 E62.9 U$5.P2
P6: E44.4 E48.1 E51.10 E54.5 E57.2 E60.2 E63.3 U$5.P1
P7: E65.13 E68.10 E71.6 E74.8 E78.3 E80.9 E83.9 U$7.P2
P8: E65.4 E69.1 E72.10 E75.5 E78.2 E81.2 E84.3 U$7.P1
P9: E86.13 E89.10 E92.6 E95.8 E99.3 E101.9 E104.9 U$9.P2
P10: E86.4 E90.1 E93.10 E96.5 E99.2 E102.2 E105.3 U$9.P1
P11: E107.13 E110.10 E113.6 E116.8 E120.3 E122.9 E125.9 U$11.P2
P12: E107.4 E111.1 E114.10 E117.5 E120.2 E123.2 E126.3 U$11.P1
R1: E3.5 E6.5 E9.2 E12.9 E15.6 E18.4 E21.14 U$1.R1
R2: E3.4 E6.12 E8.9 E12.1 E15.1 E17.8 E20.8 U$1.R2
R3: E23.12 E26.9 E30.1 E33.1 E36.4 E38.8 E41.8 U$2.R2
R4: E23.5 E27.2 E30.9 E33.6 E36.5 E39.4 E42.14 U$2.R1
R5: E44.12 E47.9 E51.1 E54.1 E57.4 E59.8 E62.8 U$5.R2
R6: E44.5 E48.2 E51.9 E54.6 E57.5 E60.4 E63.14 U$5.R1
R7: E65.12 E68.9 E72.1 E75.1 E78.4 E80.8 E83.8 U$7.R2
R8: E65.5 E69.2 E72.9 E75.6 E78.5 E81.4 E84.14 U$7.R1
R9: E86.12 E89.9 E93.1 E96.1 E99.4 E101.8 E104.8 U$9.R2
R10: E86.5 E90.2 E93.9 E96.6 E99.5 E102.4 E105.14 U$9.R1
R11: E107.12 E110.9 E114.1 E117.1 E120.4 E122.8 E125.8 U$11.R2
R12: E107.5 E111.2 E114.9 E117.6 E120.5 E123.4 E126.14 U$11.R1
S1: E3.6 E6.6 E9.13 E12.8 E18.5 E21.12 U$1.S1
S2: E3.13 E6.11 E8.8 E12.2 E15.2 E18.11 E21.5 U$1.S2
S3: E23.11 E26.8 E30.2 E33.2 E36.13 E39.11 E42.5 U$2.S2
S4: E23.6 E27.13 E30.8 E36.6 E39.5 E42.12 U$2.S1
S5: E44.11 E47.8 E51.2 E54.2 E57.13 E60.11 E63.5 U$5.S2
S6: E44.6 E48.13 E51.8 E57.6 E60.5 E63.12 U$5.S1
S7: E65.11 E68.8 E72.2 E75.2 E78.13 E81.11 E84.5 U$7.S2
S8: E65.6 E69.13 E72.8 E78.6 E81.5 E84.12 U$7.S1
S9: E86.11 E89.8 E93.2 E96.2 E99.13 E102.11 E105.5 U$9.S2
S10: E86.6 E90.13 E93.8 E99.6 E102.5 E105.12 U$9.S1
S11: E107.11 E110.8 E114.2 E117.2 E120.13 E123.11 E126.5 U$11.S2
S12: E107.6 E111.13 E114.8 E120.6 E123.5 E126.12 U$11.S1
T1: E23.10 E27.3 E30.4 E33.3 E36.12 E39.12 E42.10 U$2.T2
T2: E3.12 E6.10 E9.3 E12.4 E15.3 E18.12 E21.10 U$1.T2
T3: E44.10 E48.3 E51.4 E54.3 E57.12 E60.12 E63.10 U$5.T2
T4: E65.10 E69.3 E72.4 E75.3 E78.12 E81.12 E84.10 U$7.T2
T5: E86.10 E90.3 E93.4 E96.3 E99.12 E102.12 E105.10 U$9.T2
T6: E107.10 E111.3 E114.4 E117.3 E120.12 E123.12 E126.10 U$11.T2
U1: E3.10 E9.12 E18.6 E21.13 R1.2 R2.1 U$1.U1
U2: E3.9 E6.9 E9.4 E12.5 E15.4 E18.10 E21.7 U$1.U2
U3: E23.9 E27.4 E30.5 E33.4 E36.9 E39.10 E42.7 U$2.U2
U4: E27.12 E36.10 E39.6 E42.13 R5.2 R6.1 U$2.U1
U5: E44.9 E48.4 E51.5 E54.4 E57.9 E60.10 E63.7 U$5.U2
U6: E48.12 E57.10 E60.6 E63.13 R9.2 R10.1 U$5.U1
U7: E65.9 E69.4 E72.5 E75.4 E78.9 E81.10 E84.7 U$7.U2
U8: E69.12 E78.10 E81.6 E84.13 R13.2 R14.1 U$7.U1
U9: E86.9 E90.4 E93.5 E96.4 E99.9 E102.10 E105.7 U$9.U2
U10: E90.12 E99.10 E102.6 E105.13 R17.2 R18.1 U$9.U1
U11: E107.9 E111.4 E114.5 E117.4 E120.9 E123.10 E126.7 U$11.U2
U12: E111.12 E120.10 E123.6 E126.13 R21.2 R22.1 U$11.U1
V1: E3.11 E9.6 E18.8 E21.8 R3.2 R4.1 U$1.V1
V2: E3.8 E6.8 E9.5 E12.6 E15.8 E18.9 E21.9 U$1.V2
V3: E27.6 E36.11 E39.8 E42.8 R7.1 R8.2 U$2.V1
V4: E23.8 E27.5 E30.6 E33.8 E36.8 E39.9 E42.9 U$2.V2
V5: E48.6 E57.11 E60.8 E63.8 R11.1 R12.2 U$5.V1
V6: E44.8 E48.5 E51.6 E54.8 E57.8 E60.9 E63.9 U$5.V2
V7: E69.6 E78.11 E81.8 E84.8 R15.1 R16.2 U$7.V1
V8: E65.8 E69.5 E72.6 E75.8 E78.8 E81.9 E84.9 U$7.V2
V9: E90.6 E99.11 E102.8 E105.8 R19.1 R20.2 U$9.V1
V10: E86.8 E90.5 E93.6 E96.8 E99.8 E102.9 E105.9 U$9.V2
V11: E111.6 E120.11 E123.8 E126.8 R23.1 R24.2 U$11.V1
V12: E107.8 E111.5 E114.6 E117.8 E120.8 E123.9 E126.9 U$11.V2
VCC [Power]: C1.1 C2.1 C3.1 C4.1 C5.1 C6.1 C7.1 C8.1 C9.1 C10.1 C11.1 C12.1 C13.1 C14.1 C15.1 C16.1 C17.1 C18.1 C19.1 C20.1 C21.1 E1.14 E2.14 E3.14 E4.14 E5.14 E6.14 E7.14 E8.14 E9.14 E10.14 E11.14 E12.14 E13.14 E14.14 E15.14 E16.14 E17.14 E18.14 E19.4 E20.4 E21.4 R2.2 R4.2 U$1.A2
VCC1 [Power]: C22.1 C23.1 C24.1 C25.1 C26.1 C27.1 C28.1 C29.1 C30.1 C31.1 C32.1 C33.1 C34.1 C35.1 C36.1 C37.1 C38.1 C39.1 C40.1 C41.1 C42.1 E22.14 E23.14 E24.14 E25.14 E26.14 E27.14 E28.14 E29.14 E30.14 E31.14 E32.14 E33.14 E34.14 E35.14 E36.14 E37.14 E38.14 E39.14 E40.4 E41.4 E42.4 R6.2 R7.2 U$2.A2
VCC2 [Power]: C43.1 C44.1 C45.1 C46.1 C47.1 C48.1 C49.1 C50.1 C51.1 C52.1 C53.1 C54.1 C55.1 C56.1 C57.1 C58.1 C59.1 C60.1 C61.1 C62.1 C63.1 E43.14 E44.14 E45.14 E46.14 E47.14 E48.14 E49.14 E50.14 E51.14 E52.14 E53.14 E54.14 E55.14 E56.14 E57.14 E58.14 E59.14 E60.14 E61.4 E62.4 E63.4 R10.2 R11.2 U$5.A2
VCC3 [Power]: C64.1 C65.1 C66.1 C67.1 C68.1 C69.1 C70.1 C71.1 C72.1 C73.1 C74.1 C75.1 C76.1 C77.1 C78.1 C79.1 C80.1 C81.1 C82.1 C83.1 C84.1 E64.14 E65.14 E66.14 E67.14 E68.14 E69.14 E70.14 E71.14 E72.14 E73.14 E74.14 E75.14 E76.14 E77.14 E78.14 E79.14 E80.14 E81.14 E82.4 E83.4 E84.4 R14.2 R15.2 U$7.A2
VCC4 [Power]: C85.1 C86.1 C87.1 C88.1 C89.1 C90.1 C91.1 C92.1 C93.1 C94.1 C95.1 C96.1 C97.1 C98.1 C99.1 C100.1 C101.1 C102.1 C103.1 C104.1 C105.1 E85.14 E86.14 E87.14 E88.14 E89.14 E90.14 E91.14 E92.14 E93.14 E94.14 E95.14 E96.14 E97.14 E98.14 E99.14 E100.14 E101.14 E102.14 E103.4 E104.4 E105.4 R18.2 R19.2 U$9.A2
VCC5 [Power]: C106.1 C107.1 C108.1 C109.1 C110.1 C111.1 C112.1 C113.1 C114.1 C115.1 C116.1 C117.1 C118.1 C119.1 C120.1 C121.1 C122.1 C123.1 C124.1 C125.1 C126.1 E106.14 E107.14 E108.14 E109.14 E110.14 E111.14 E112.14 E113.14 E114.14 E115.14 E116.14 E117.14 E118.14 E119.14 E120.14 E121.14 E122.14 E123.14 E124.4 E125.4 E126.4 R22.2 R23.2 U$11.A2

## Tracks (layer width: path | path; a pad name or v marks a point on that pad's centre or on a via)
A1  (via drill 0.61)
  Top 0.254: v32.38,7.62 31.11,8.89 E1.1 | v41.91,8.26 43.18,8.26 43.18,8.89 E4.1 | v55.88,8.89 E7.1 57.78,8.89 57.78,7.62 v59.05,6.35 | E10.13 62.87,10.16 62.87,9.53 61.59,8.26 v61.59,6.35 60.33,5.08 v60.33,2.54 60.33,0.64 20.32,0.64 17.14,3.81 8.26,3.81 U$1.A1 | J2.1 87.63,55.88 87.63,58.42 J1.1 | E19.2 105.41,10.16 106.68,8.89 106.68,6.99 104.78,5.08 v104.78,3.81 104.78,1.91 96.52,1.91 95.25,3.17 95.25,6.99 v94.61,7.62 93.34,8.89 E16.1 | E13.12 73.66,11.43 73.66,9.53 v71.75,7.62
  Bottom 0.254: v32.38,7.62 36.2,7.62 36.83,8.26 v41.91,8.26 55.24,8.26 v55.88,8.89 | v59.05,6.35 v61.59,6.35 | v71.75,7.62 72.39,8.26 93.98,8.26 v94.61,7.62 | J1.1 88.27,61.59 104.78,61.59 110.49,55.88 110.49,8.89 109.86,8.89 v104.78,3.81 102.23,1.27 81.28,1.27 79.38,3.17 60.96,3.17 v60.33,2.54
A2  (via drill 0.61)
  Top 0.254: v32.38,71.12 31.11,72.39 E34.1 | v41.91,71.75 43.18,71.75 43.18,72.39 E22.1 | v55.88,72.39 E25.1 57.78,72.39 57.78,71.12 v59.05,69.85 | E28.13 62.87,73.66 62.87,73.03 61.59,71.75 v61.59,69.85 60.33,68.58 v60.33,66.04 60.33,64.14 20.32,64.14 17.14,67.31 8.26,67.31 U$2.A1 | J4.1 87.63,119.38 87.63,121.92 J3.1 | E40.2 105.41,73.66 106.68,72.39 106.68,70.48 104.78,68.58 v104.78,67.31 104.78,65.41 96.52,65.41 95.25,66.67 95.25,70.48 v94.61,71.12 93.34,72.39 E37.1 | E31.12 73.66,74.93 73.66,73.03 v71.75,71.12
  Bottom 0.254: v32.38,71.12 36.2,71.12 36.83,71.75 v41.91,71.75 55.24,71.75 v55.88,72.39 | v59.05,69.85 v61.59,69.85 | v71.75,71.12 72.39,71.75 93.98,71.75 v94.61,71.12 | J3.1 88.27,125.09 104.78,125.09 110.49,119.38 110.49,72.39 109.86,72.39 v104.78,67.31 102.23,64.77 81.28,64.77 79.38,66.67 60.96,66.67 v60.33,66.04
A3  (via drill 0.61)
  Top 0.254: v32.38,134.62 31.11,135.89 E55.1 | v41.91,135.25 43.18,135.25 43.18,135.89 E43.1 | v55.88,135.89 E46.1 57.78,135.89 57.78,134.62 v59.05,133.35 | E49.13 62.87,137.16 62.87,136.53 61.59,135.25 v61.59,133.35 60.33,132.08 v60.33,129.54 60.33,127.64 20.32,127.64 17.14,130.81 8.26,130.81 U$5.A1 | J6.1 87.63,182.88 87.63,185.42 J5.1 | E61.2 105.41,137.16 106.68,135.89 106.68,133.99 104.78,132.08 v104.78,130.81 104.78,128.91 96.52,128.91 95.25,130.18 95.25,133.99 v94.61,134.62 93.34,135.89 E58.1 | E52.12 73.66,138.43 73.66,136.53 v71.75,134.62
  Bottom 0.254: v32.38,134.62 36.2,134.62 36.83,135.25 v41.91,135.25 55.24,135.25 v55.88,135.89 | v59.05,133.35 v61.59,133.35 | v71.75,134.62 72.39,135.25 93.98,135.25 v94.61,134.62 | J5.1 88.27,188.59 104.78,188.59 110.49,182.88 110.49,135.89 109.86,135.89 v104.78,130.81 102.23,128.27 81.28,128.27 79.38,130.18 60.96,130.18 v60.33,129.54
A4  (via drill 0.61)
  Top 0.254: v220.34,181.61 221.62,180.34 E76.1 | v210.82,180.97 209.55,180.97 209.55,180.34 E64.1 | v196.85,180.34 E67.1 194.94,180.34 194.94,181.61 v193.68,182.88 | E70.13 189.87,179.07 189.87,179.71 191.13,180.97 v191.13,182.88 192.41,184.15 v192.41,186.69 192.41,188.59 232.41,188.59 235.59,185.42 244.47,185.42 U$7.A1 | J8.1 165.1,133.35 165.1,130.81 J7.1 | E82.2 147.32,179.07 146.05,180.34 146.05,182.25 147.96,184.15 v147.96,185.42 147.96,187.32 156.21,187.32 157.48,186.06 157.48,182.25 v158.12,181.61 159.38,180.34 E79.1 | E73.12 179.07,177.8 179.07,179.71 v180.97,181.61
  Bottom 0.254: v220.34,181.61 216.53,181.61 215.9,180.97 v210.82,180.97 197.49,180.97 v196.85,180.34 | v193.68,182.88 v191.13,182.88 | v180.97,181.61 180.34,180.97 158.75,180.97 v158.12,181.61 | J7.1 164.47,127.64 147.96,127.64 142.24,133.35 142.24,180.34 142.88,180.34 v147.96,185.42 150.5,187.96 171.45,187.96 173.35,186.06 191.77,186.06 v192.41,186.69
A5  (via drill 0.61)
  Top 0.254: v220.34,118.11 221.62,116.84 E97.1 | v210.82,117.47 209.55,117.47 209.55,116.84 E85.1 | v196.85,116.84 E88.1 194.94,116.84 194.94,118.11 v193.68,119.38 | E91.13 189.87,115.57 189.87,116.2 191.13,117.47 v191.13,119.38 192.41,120.65 v192.41,123.19 192.41,125.09 232.41,125.09 235.59,121.92 244.47,121.92 U$9.A1 | J10.1 165.1,69.85 165.1,67.31 J9.1 | E103.2 147.32,115.57 146.05,116.84 146.05,118.75 147.96,120.65 v147.96,121.92 147.96,123.83 156.21,123.83 157.48,122.56 157.48,118.75 v158.12,118.11 159.38,116.84 E100.1 | E94.12 179.07,114.3 179.07,116.2 v180.97,118.11
  Bottom 0.254: v220.34,118.11 216.53,118.11 215.9,117.47 v210.82,117.47 197.49,117.47 v196.85,116.84 | v193.68,119.38 v191.13,119.38 | v180.97,118.11 180.34,117.47 158.75,117.47 v158.12,118.11 | J9.1 164.47,64.14 147.96,64.14 142.24,69.85 142.24,116.84 142.88,116.84 v147.96,121.92 150.5,124.46 171.45,124.46 173.35,122.56 191.77,122.56 v192.41,123.19
A6  (via drill 0.61)
  Top 0.254: v220.34,54.61 221.62,53.34 E118.1 | v210.82,53.98 209.55,53.98 209.55,53.34 E106.1 | v196.85,53.34 E109.1 194.94,53.34 194.94,54.61 v193.68,55.88 | E112.13 189.87,52.07 189.87,52.7 191.13,53.98 v191.13,55.88 192.41,57.15 v192.41,59.69 192.41,61.59 232.41,61.59 235.59,58.42 244.47,58.42 U$11.A1 | J12.1 165.1,6.35 165.1,3.81 J11.1 | E124.2 147.32,52.07 146.05,53.34 146.05,55.24 147.96,57.15 v147.96,58.42 147.96,60.33 156.21,60.33 157.48,59.05 157.48,55.24 v158.12,54.61 159.38,53.34 E121.1 | E115.12 179.07,50.8 179.07,52.7 v180.97,54.61
  Bottom 0.254: v220.34,54.61 216.53,54.61 215.9,53.98 v210.82,53.98 197.49,53.98 v196.85,53.34 | v193.68,55.88 v191.13,55.88 | v180.97,54.61 180.34,53.98 158.75,53.98 v158.12,54.61 | J11.1 164.47,0.64 147.96,0.64 142.24,6.35 142.24,53.34 142.88,53.34 v147.96,58.42 150.5,60.96 171.45,60.96 173.35,59.05 191.77,59.05 v192.41,59.69
B1  (via drill 0.61)
  Top 0.254: E1.2 31.75,10.16 v33.02,8.89 34.92,6.99 34.92,5.71 v36.83,3.81 45.72,3.81 45.72,8.89 44.45,10.16 E4.2 | E7.2 54.61,10.16 v54.61,9.53 | E10.12 66.04,11.43 v66.04,9.53 66.04,5.71 65.41,5.08 65.41,3.81 75.56,3.81 | 75.56,3.81 77.47,5.71 77.47,12.7 E13.11 v73.66,12.7 | v88.9,11.43 E16.3 | v98.42,3.17 104.14,8.89 E19.1 | v81.28,2.54 79.38,0.64 75.56,0.64 75.56,3.81 | v20.95,3.81 18.41,3.81 17.14,5.08 17.14,6.99 8.26,6.99 U$1.B1
  Bottom 0.254: v33.02,8.89 41.27,8.89 41.91,9.53 42.55,8.89 53.98,8.89 v54.61,9.53 55.24,10.16 59.69,10.16 60.33,9.53 v66.04,9.53 | v88.9,11.43 87.63,12.7 v73.66,12.7 | v98.42,3.17 97.16,1.91 81.92,1.91 v81.28,2.54 | v36.83,3.81 v20.95,3.81
B4  (via drill 0.61)
  Top 0.254: E34.2 31.75,73.66 v33.02,72.39 34.92,70.48 34.92,69.22 v36.83,67.31 45.72,67.31 45.72,72.39 44.45,73.66 E22.2 | E25.2 54.61,73.66 v54.61,73.03 | E28.12 66.04,74.93 v66.04,73.03 66.04,69.22 65.41,68.58 65.41,67.31 75.56,67.31 | 75.56,67.31 77.47,69.22 77.47,76.2 E31.11 v73.66,76.2 | v88.9,74.93 E37.3 | v98.42,66.67 104.14,72.39 E40.1 | v81.28,66.04 79.38,64.14 75.56,64.14 75.56,67.31 | v20.95,67.31 18.41,67.31 17.14,68.58 17.14,70.48 8.26,70.48 U$2.B1
  Bottom 0.254: v33.02,72.39 41.27,72.39 41.91,73.03 42.55,72.39 53.98,72.39 v54.61,73.03 55.24,73.66 59.69,73.66 60.33,73.03 v66.04,73.03 | v88.9,74.93 87.63,76.2 v73.66,76.2 | v98.42,66.67 97.16,65.41 81.92,65.41 v81.28,66.04 | v36.83,67.31 v20.95,67.31
B6  (via drill 0.61)
  Top 0.254: E55.2 31.75,137.16 v33.02,135.89 34.92,133.99 34.92,132.72 v36.83,130.81 45.72,130.81 45.72,135.89 44.45,137.16 E43.2 | E46.2 54.61,137.16 v54.61,136.53 | E49.12 66.04,138.43 v66.04,136.53 66.04,132.72 65.41,132.08 65.41,130.81 75.56,130.81 | 75.56,130.81 77.47,132.72 77.47,139.7 E52.11 v73.66,139.7 | v88.9,138.43 E58.3 | v98.42,130.18 104.14,135.89 E61.1 | v81.28,129.54 79.38,127.64 75.56,127.64 75.56,130.81 | v20.95,130.81 18.41,130.81 17.14,132.08 17.14,133.99 8.26,133.99 U$5.B1
  Bottom 0.254: v33.02,135.89 41.27,135.89 41.91,136.53 42.55,135.89 53.98,135.89 v54.61,136.53 55.24,137.16 59.69,137.16 60.33,136.53 v66.04,136.53 | v88.9,138.43 87.63,139.7 v73.66,139.7 | v98.42,130.18 97.16,128.91 81.92,128.91 v81.28,129.54 | v36.83,130.81 v20.95,130.81
B8  (via drill 0.61)
  Top 0.254: E76.2 220.98,179.07 v219.71,180.34 217.81,182.25 217.81,183.51 v215.9,185.42 207.01,185.42 207.01,180.34 208.28,179.07 E64.2 | E67.2 198.12,179.07 v198.12,179.71 | E70.12 186.69,177.8 v186.69,179.71 186.69,183.51 187.32,184.15 187.32,185.42 177.16,185.42 | 177.16,185.42 175.26,183.51 175.26,176.53 E73.11 v179.07,176.53 | v163.83,177.8 E79.3 | v154.31,186.06 148.59,180.34 E82.1 | v171.45,186.69 173.35,188.59 177.16,188.59 177.16,185.42 | v231.78,185.42 234.31,185.42 235.59,184.15 235.59,182.25 244.47,182.25 U$7.B1
  Bottom 0.254: v219.71,180.34 211.46,180.34 210.82,179.71 210.19,180.34 198.75,180.34 v198.12,179.71 197.49,179.07 193.04,179.07 192.41,179.71 v186.69,179.71 | v163.83,177.8 165.1,176.53 v179.07,176.53 | v154.31,186.06 155.57,187.32 170.81,187.32 v171.45,186.69 | v215.9,185.42 v231.78,185.42
B10  (via drill 0.61)
  Top 0.254: E97.2 220.98,115.57 v219.71,116.84 217.81,118.75 217.81,120.02 v215.9,121.92 207.01,121.92 207.01,116.84 208.28,115.57 E85.2 | E88.2 198.12,115.57 v198.12,116.2 | E91.12 186.69,114.3 v186.69,116.2 186.69,120.02 187.32,120.65 187.32,121.92 177.16,121.92 | 177.16,121.92 175.26,120.02 175.26,113.03 E94.11 v179.07,113.03 | v163.83,114.3 E100.3 | v154.31,122.56 148.59,116.84 E103.1 | v171.45,123.19 173.35,125.09 177.16,125.09 177.16,121.92 | v231.78,121.92 234.31,121.92 235.59,120.65 235.59,118.75 244.47,118.75 U$9.B1
  Bottom 0.254: v219.71,116.84 211.46,116.84 210.82,116.2 210.19,116.84 198.75,116.84 v198.12,116.2 197.49,115.57 193.04,115.57 192.41,116.2 v186.69,116.2 | v163.83,114.3 165.1,113.03 v179.07,113.03 | v154.31,122.56 155.57,123.83 170.81,123.83 v171.45,123.19 | v215.9,121.92 v231.78,121.92
B12  (via drill 0.61)
  Top 0.254: E118.2 220.98,52.07 v219.71,53.34 217.81,55.24 217.81,56.52 v215.9,58.42 207.01,58.42 207.01,53.34 208.28,52.07 E106.2 | E109.2 198.12,52.07 v198.12,52.7 | E112.12 186.69,50.8 v186.69,52.7 186.69,56.52 187.32,57.15 187.32,58.42 177.16,58.42 | 177.16,58.42 175.26,56.52 175.26,49.53 E115.11 v179.07,49.53 | v163.83,50.8 E121.3 | v154.31,59.05 148.59,53.34 E124.1 | v171.45,59.69 173.35,61.59 177.16,61.59 177.16,58.42 | v231.78,58.42 234.31,58.42 235.59,57.15 235.59,55.24 244.47,55.24 U$11.B1
  Bottom 0.254: v219.71,53.34 211.46,53.34 210.82,52.7 210.19,53.34 198.75,53.34 v198.12,52.7 197.49,52.07 193.04,52.07 192.41,52.7 v186.69,52.7 | v163.83,50.8 165.1,49.53 v179.07,49.53 | v154.31,59.05 155.57,60.33 170.81,60.33 v171.45,59.69 | v215.9,58.42 v231.78,58.42
C1  (via drill 0.61)
  Top 0.254: E19.3 103.5,11.43 102.87,10.79 102.87,8.89 101.6,7.62 97.79,7.62 95.25,10.16 E16.2 v90.17,10.16 | v49.53,10.16 E7.13 | v41.91,10.79 42.55,11.43 E4.3 | E1.3 33.02,11.43 v33.02,10.16 | E10.10 v62.23,13.97 v62.23,10.79 | v80.01,13.97 E13.5 | v15.88,11.43 15.88,10.79 8.26,10.79 U$1.C1
  Bottom 0.254: 48.9,10.79 v49.53,10.16 | 48.9,10.79 v41.91,10.79 40.64,9.53 33.66,9.53 v33.02,10.16 32.38,10.79 16.51,10.79 v15.88,11.43 | 48.9,10.79 v62.23,10.79 66.67,10.79 68.58,8.89 88.9,8.89 v90.17,10.16 | v80.01,13.97 79.38,13.34 74.3,13.34 73.66,13.97 v62.23,13.97
C2  (via drill 0.61)
  Top 0.254: E40.3 103.5,74.93 102.87,74.3 102.87,72.39 101.6,71.12 97.79,71.12 95.25,73.66 E37.2 v90.17,73.66 | v49.53,73.66 E25.13 | v41.91,74.3 42.55,74.93 E22.3 | E34.3 33.02,74.93 v33.02,73.66 | E28.10 v62.23,77.47 v62.23,74.3 | v80.01,77.47 E31.5 | v15.88,74.93 15.88,74.3 8.26,74.3 U$2.C1
  Bottom 0.254: 48.9,74.3 v49.53,73.66 | 48.9,74.3 v41.91,74.3 40.64,73.03 33.66,73.03 v33.02,73.66 32.38,74.3 16.51,74.3 v15.88,74.93 | 48.9,74.3 v62.23,74.3 66.67,74.3 68.58,72.39 88.9,72.39 v90.17,73.66 | v80.01,77.47 79.38,76.83 74.3,76.83 73.66,77.47 v62.23,77.47
C3  (via drill 0.61)
  Top 0.254: E61.3 103.5,138.43 102.87,137.79 102.87,135.89 101.6,134.62 97.79,134.62 95.25,137.16 E58.2 v90.17,137.16 | v49.53,137.16 E46.13 | v41.91,137.79 42.55,138.43 E43.3 | E55.3 33.02,138.43 v33.02,137.16 | E49.10 v62.23,140.97 v62.23,137.79 | v80.01,140.97 E52.5 | v15.88,138.43 15.88,137.79 8.26,137.79 U$5.C1
  Bottom 0.254: 48.9,137.79 v49.53,137.16 | 48.9,137.79 v41.91,137.79 40.64,136.53 33.66,136.53 v33.02,137.16 32.38,137.79 16.51,137.79 v15.88,138.43 | 48.9,137.79 v62.23,137.79 66.67,137.79 68.58,135.89 88.9,135.89 v90.17,137.16 | v80.01,140.97 79.38,140.34 74.3,140.34 73.66,140.97 v62.23,140.97
C4  (via drill 0.61)
  Top 0.254: E82.3 149.22,177.8 149.86,178.44 149.86,180.34 151.13,181.61 154.94,181.61 157.48,179.07 E79.2 v162.56,179.07 | v203.2,179.07 E67.13 | v210.82,178.44 210.19,177.8 E64.3 | E76.3 219.71,177.8 v219.71,179.07 | E70.10 v190.5,175.26 v190.5,178.44 | v172.72,175.26 E73.5 | v236.85,177.8 236.85,178.44 244.47,178.44 U$7.C1
  Bottom 0.254: 203.84,178.44 v203.2,179.07 | 203.84,178.44 v210.82,178.44 212.09,179.71 219.07,179.71 v219.71,179.07 220.34,178.44 236.22,178.44 v236.85,177.8 | 203.84,178.44 v190.5,178.44 186.06,178.44 184.15,180.34 163.83,180.34 v162.56,179.07 | v172.72,175.26 173.35,175.9 178.44,175.9 179.07,175.26 v190.5,175.26
C5  (via drill 0.61)
  Top 0.254: E103.3 149.22,114.3 149.86,114.94 149.86,116.84 151.13,118.11 154.94,118.11 157.48,115.57 E100.2 v162.56,115.57 | v203.2,115.57 E88.13 | v210.82,114.94 210.19,114.3 E85.3 | E97.3 219.71,114.3 v219.71,115.57 | E91.10 v190.5,111.76 v190.5,114.94 | v172.72,111.76 E94.5 | v236.85,114.3 236.85,114.94 244.47,114.94 U$9.C1
  Bottom 0.254: 203.84,114.94 v203.2,115.57 | 203.84,114.94 v210.82,114.94 212.09,116.2 219.07,116.2 v219.71,115.57 220.34,114.94 236.22,114.94 v236.85,114.3 | 203.84,114.94 v190.5,114.94 186.06,114.94 184.15,116.84 163.83,116.84 v162.56,115.57 | v172.72,111.76 173.35,112.39 178.44,112.39 179.07,111.76 v190.5,111.76
C6  (via drill 0.61)
  Top 0.254: E124.3 149.22,50.8 149.86,51.44 149.86,53.34 151.13,54.61 154.94,54.61 157.48,52.07 E121.2 v162.56,52.07 | v203.2,52.07 E109.13 | v210.82,51.44 210.19,50.8 E106.3 | E118.3 219.71,50.8 v219.71,52.07 | E112.10 v190.5,48.26 v190.5,51.44 | v172.72,48.26 E115.5 | v236.85,50.8 236.85,51.44 244.47,51.44 U$11.C1
  Bottom 0.254: 203.84,51.44 v203.2,52.07 | 203.84,51.44 v210.82,51.44 212.09,52.7 219.07,52.7 v219.71,52.07 220.34,51.44 236.22,51.44 v236.85,50.8 | 203.84,51.44 v190.5,51.44 186.06,51.44 184.15,53.34 163.83,53.34 v162.56,52.07 | v172.72,48.26 173.35,48.9 178.44,48.9 179.07,48.26 v190.5,48.26
D1  (via drill 0.61)
  Top 0.254: 53.34,11.43 E7.12 | v53.34,16.51 53.34,11.43 | v66.04,16.51 66.04,15.88 65.41,15.24 E10.9 | E1.5 34.29,13.97 34.29,16.51 v35.56,17.78 | E4.4 46.35,12.7 v46.35,2.54 | v50.16,2.54 53.34,5.71 53.34,11.43 | v80.01,15.24 E13.6 v83.82,15.24 | E16.4 91.44,12.7 v91.44,13.34 | v101.6,8.89 E19.14 | v18.41,5.08 18.41,13.34 8.26,13.34 U$1.D1
  Bottom 0.254: v35.56,17.78 50.8,17.78 52.07,16.51 v53.34,16.51 v66.04,16.51 78.74,16.51 v80.01,15.24 | v50.16,2.54 v46.35,2.54 20.95,2.54 v18.41,5.08 | v91.44,13.34 90.17,14.61 86.36,14.61 | 86.36,14.61 84.45,14.61 v83.82,15.24 | v101.6,8.89 101.6,15.88 98.42,15.88 97.79,16.51 96.52,16.51 95.25,17.78 89.53,17.78 86.36,14.61
D2  (via drill 0.61)
  Top 0.254: 35.56,10.16 34.29,10.16 34.29,11.43 33.02,12.7 E1.4 v29.21,12.7 | 35.56,10.16 E4.13 | E7.3 59.69,11.43 v59.69,8.89 | v67.94,8.26 69.85,8.26 69.85,8.89 E10.1 71.12,8.89 72.39,10.16 v72.39,10.79 | 80.01,8.89 E13.1 | v80.01,10.79 80.01,8.89 | v88.9,12.7 E16.11 | v95.89,7.62 96.52,6.99 v96.52,3.17 | v81.92,3.81 80.01,5.71 80.01,8.89 | E19.5 107.31,13.97 v107.31,5.08 | 35.56,10.16 35.56,6.35 v36.83,5.08
  Bottom 0.254: v29.21,12.7 28.57,13.34 8.26,13.34 U$1.D2 | v59.69,8.89 60.33,8.26 v67.94,8.26 | v72.39,10.79 v80.01,10.79 | v88.9,12.7 92.71,8.89 94.61,8.89 v95.89,7.62 | v96.52,3.17 95.89,2.54 83.19,2.54 v81.92,3.81 59.05,3.81 | v107.31,5.08 102.87,0.64 60.96,0.64 59.05,2.54 59.05,3.81 | v36.83,5.08 38.1,3.81 59.05,3.81
D3  (via drill 0.61)
  Top 0.254: 35.56,73.66 34.29,73.66 34.29,74.93 33.02,76.2 E34.4 v29.21,76.2 | 35.56,73.66 E22.13 | E25.3 59.69,74.93 v59.69,72.39 | v67.94,71.75 69.85,71.75 69.85,72.39 E28.1 71.12,72.39 72.39,73.66 v72.39,74.3 | 80.01,72.39 E31.1 | v80.01,74.3 80.01,72.39 | v88.9,76.2 E37.11 | v95.89,71.12 96.52,70.48 v96.52,66.67 | v81.92,67.31 80.01,69.22 80.01,72.39 | E40.5 107.31,77.47 v107.31,68.58 | 35.56,73.66 35.56,69.85 v36.83,68.58
  Bottom 0.254: v29.21,76.2 28.57,76.83 8.26,76.83 U$2.D2 | v59.69,72.39 60.33,71.75 v67.94,71.75 | v72.39,74.3 v80.01,74.3 | v88.9,76.2 92.71,72.39 94.61,72.39 v95.89,71.12 | v96.52,66.67 95.89,66.04 83.19,66.04 v81.92,67.31 59.05,67.31 | v107.31,68.58 102.87,64.14 60.96,64.14 59.05,66.04 59.05,67.31 | v36.83,68.58 38.1,67.31 59.05,67.31
D4  (via drill 0.61)
  Top 0.254: 53.34,74.93 E25.12 | v53.34,80.01 53.34,74.93 | v66.04,80.01 66.04,79.38 65.41,78.74 E28.9 | E34.5 34.29,77.47 34.29,80.01 v35.56,81.28 | E22.4 46.35,76.2 v46.35,66.04 | v50.16,66.04 53.34,69.22 53.34,74.93 | v80.01,78.74 E31.6 v83.82,78.74 | E37.4 91.44,76.2 v91.44,76.83 | v101.6,72.39 E40.14 | v18.41,68.58 18.41,76.83 8.26,76.83 U$2.D1
  Bottom 0.254: v35.56,81.28 50.8,81.28 52.07,80.01 v53.34,80.01 v66.04,80.01 78.74,80.01 v80.01,78.74 | v50.16,66.04 v46.35,66.04 20.95,66.04 v18.41,68.58 | v91.44,76.83 90.17,78.11 86.36,78.11 | 86.36,78.11 84.45,78.11 v83.82,78.74 | v101.6,72.39 101.6,79.38 98.42,79.38 97.79,80.01 96.52,80.01 95.25,81.28 89.53,81.28 86.36,78.11
D5  (via drill 0.61)
  Top 0.254: 35.56,137.16 34.29,137.16 34.29,138.43 33.02,139.7 E55.4 v29.21,139.7 | 35.56,137.16 E43.13 | E46.3 59.69,138.43 v59.69,135.89 | v67.94,135.25 69.85,135.25 69.85,135.89 E49.1 71.12,135.89 72.39,137.16 v72.39,137.79 | 80.01,135.89 E52.1 | v80.01,137.79 80.01,135.89 | v88.9,139.7 E58.11 | v95.89,134.62 96.52,133.99 v96.52,130.18 | v81.92,130.81 80.01,132.72 80.01,135.89 | E61.5 107.31,140.97 v107.31,132.08 | 35.56,137.16 35.56,133.35 v36.83,132.08
  Bottom 0.254: v29.21,139.7 28.57,140.34 8.26,140.34 U$5.D2 | v59.69,135.89 60.33,135.25 v67.94,135.25 | v72.39,137.79 v80.01,137.79 | v88.9,139.7 92.71,135.89 94.61,135.89 v95.89,134.62 | v96.52,130.18 95.89,129.54 83.19,129.54 v81.92,130.81 59.05,130.81 | v107.31,132.08 102.87,127.64 60.96,127.64 59.05,129.54 59.05,130.81 | v36.83,132.08 38.1,130.81 59.05,130.81
D6  (via drill 0.61)
  Top 0.254: 53.34,138.43 E46.12 | v53.34,143.51 53.34,138.43 | v66.04,143.51 66.04,142.88 65.41,142.24 E49.9 | E55.5 34.29,140.97 34.29,143.51 v35.56,144.78 | E43.4 46.35,139.7 v46.35,129.54 | v50.16,129.54 53.34,132.72 53.34,138.43 | v80.01,142.24 E52.6 v83.82,142.24 | E58.4 91.44,139.7 v91.44,140.34 | v101.6,135.89 E61.14 | v18.41,132.08 18.41,140.34 8.26,140.34 U$5.D1